# Altium PCB PCB-NW0101 Rev.D.PcbDoc (part 3 of 3)
Units mm, origin at the board's own origin, x right, y up, seen from the top; angles counter-clockwise.
Board outline 20 x 35 mm, 6 copper layers (Top, GND, Inner3, Inner4, PWR, Bottom), stack 0.74 mm thick; 118 components, 125 nets, 559 pads, 474 vias.
Unrouted connection lines stored in the file: 214.
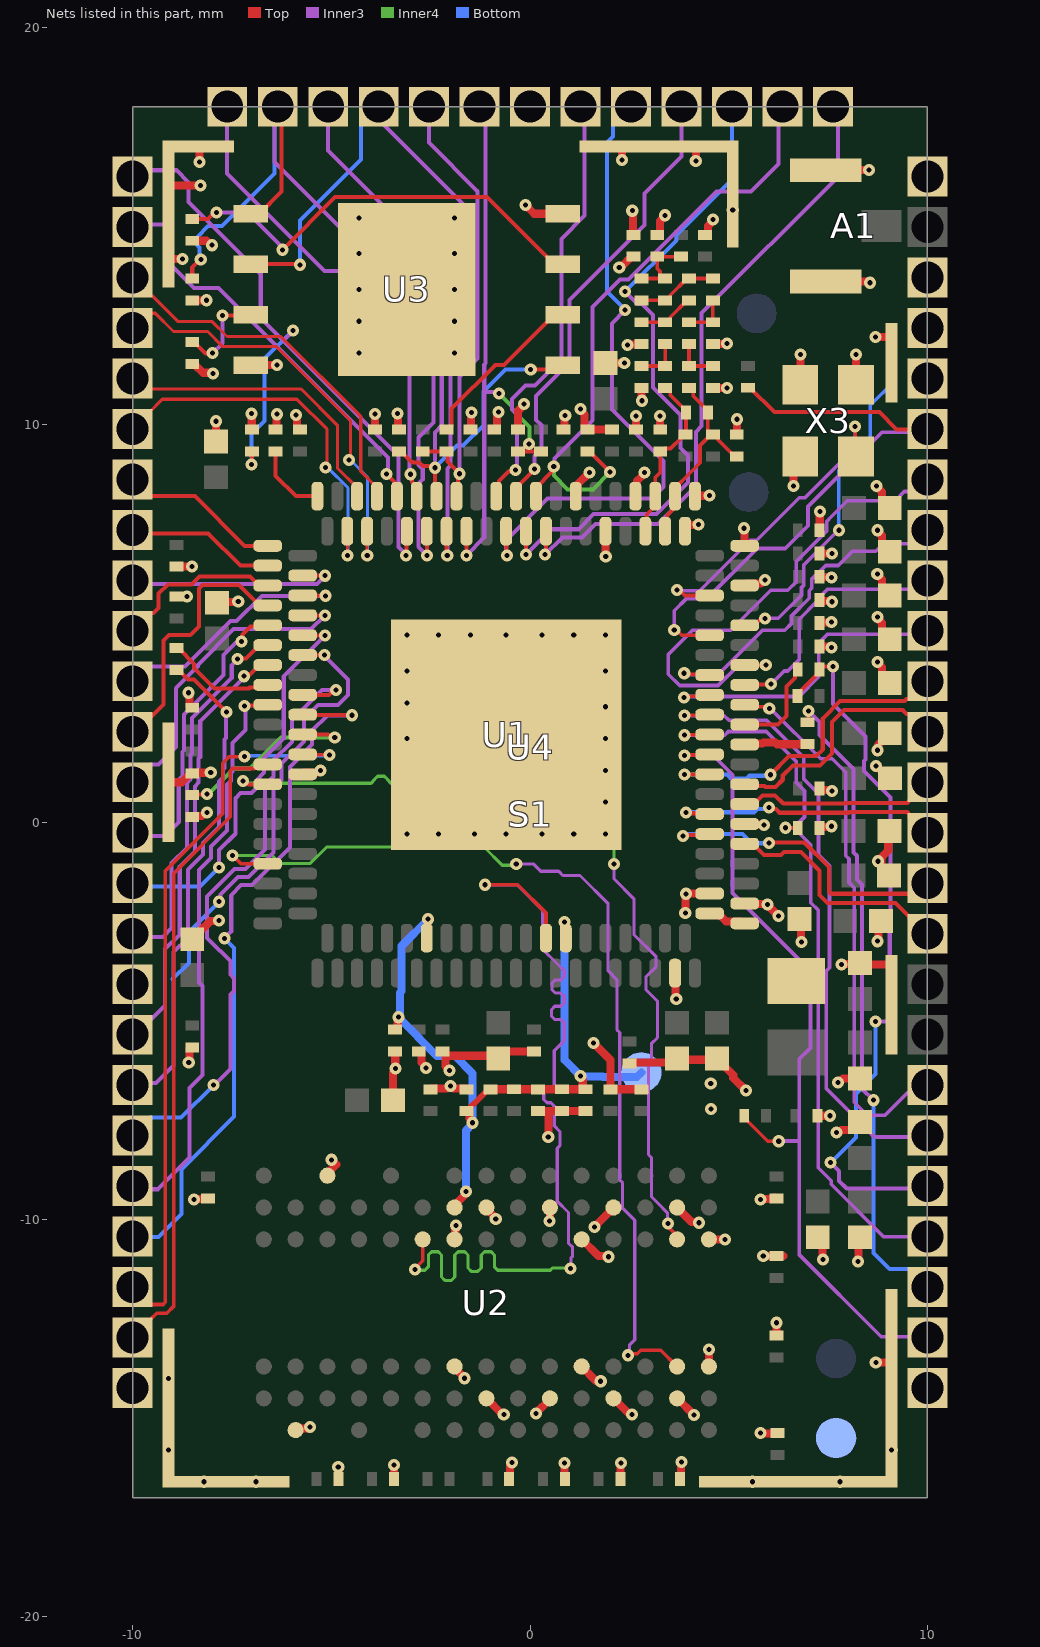
[diagram p7: the nets of this part, all layers, seen from the top]

## Via types
v1: diameter 0.305/0.305/0.305/0.305 (per signal layer), hole 0.127, Top to Bottom, tented both sides, 474 vias

## Nets (pads, with @x,y where several pads share a name; then routed paths per layer and width w, separated by ;. In a path a pad name is that pad's centre, name@x,y a point inside that pad or via, vN(x,y) a via of type N, cw(c..) or ccw(c..) an arc to the next point about the centre after c; other vN are vias at no path point) (continued)
DDR_UDM: U1.64 U2.B3 | length 22.6
  Top w0.092: v1(-7.221,1.036) -7.176,1.036 -7.086,0.945 -6.605,0.945 U1.64@-6.6,0.95 ; v1(3.468,-10.098) 3.508,-10.139 3.508,-10.223 3.7,-10.415 U2.B3@3.7,-10.5
  Inner3 w0.079: v1@2.112,-1.057 2.112,-1.429 2.611,-1.928 2.611,-2.829 3.172,-3.391 3.172,-3.639 2.918,-3.893 2.918,-4.223 3.205,-4.51 3.205,-5.426 3.052,-5.579 3.052,-5.984 2.979,-6.057 2.979,-8.369 3.052,-8.441 3.052,-9.423 3.218,-9.589 3.457,-9.828 3.457,-10.087 v1(3.468,-10.098)
  Inner4 w0.078: v1(-7.221,1.036) -7.178,0.992 -7.091,0.992 -7.075,0.976 -4.039,0.976 -3.999,0.976 -3.916,1.059 -3.916,1.069 -3.833,1.152 -3.667,1.152 -3.584,1.069 -3.584,1.059 -3.501,0.976 -3.335,0.976 -3.252,1.059 -3.252,1.069 -3.168,1.152 -3.002,1.152 -2.919,1.069 -2.919,1.059 -2.836,0.976 -2.67,0.976 -2.587,1.059 -2.587,1.069 -2.504,1.152 -2.337,1.152 -2.254,1.069 -2.254,1.059 -2.171,0.976 -2.005,0.976 -1.922,1.059 -1.922,1.069 -1.839,1.152 -1.673,1.152 -1.59,1.069 -1.59,1.059 -1.506,0.976 -1.092,0.976 0.289,0.976 1.092,0.173 1.877,0.173 2.193,-0.143 2.193,-0.546 2.112,-0.627 v1(2.112,-1.055)
DDR_UDQS: U1.72 U2.B7 | length 24.5
  Top w0.092: v1(-7.483,-0.841) -7.274,-1.05 U1.72@-6.6,-1.05 ; v1(2.463,-13.418) 2.503,-13.377 2.7,-13.377 2.785,-13.292 3.292,-13.292 U2.B7@3.7,-13.7
  Inner3 w0.079: v1(-0.348,-1.054) 0.081,-1.054 0.266,-1.239 0.718,-1.239 0.826,-1.347 1.256,-1.347 1.964,-2.055 1.964,-3.743 2.185,-3.965 2.185,-5.223 2.258,-5.295 2.258,-9.007 2.33,-9.079 2.33,-9.721 2.456,-9.848 2.633,-10.024 2.633,-13.027 2.506,-13.154 2.506,-13.375 v1(2.463,-13.418)
  Inner4 w0.078: v1(-7.483,-0.841) -7.481,-0.843 -6.49,-0.843 -6.292,-1.041 -5.531,-1.041 -5.118,-0.628 -1.16,-0.628 -0.699,-1.089 -0.382,-1.089 v1(-0.348,-1.054)
DDR_VREF: C4.1 C5.1 C11.2 C12.1 C13.1 pad.6 R1.1 R2.2 U1.90 U1.104 U2.J2 | length 19.4
  Top w0.152: C4.1@-1.55,-7.275 -1.501,-7.226 -1.501,-7.178 -1.247,-6.924 -1.247,-6.922 -1.031,-6.706 C11.2@-0.965,-6.706
  Top w0.203: C12.1@-3.335,-5.21 -3.33,-5.205 -3.33,-4.931 v1(-3.31,-4.911) ; U1.90@-2.6,-2.92 -2.581,-2.901 -2.581,-2.465 v1(-2.563,-2.446) ; U2.J2@-1.9,-9.7 -1.9,-9.645 -1.634,-9.379 -1.634,-9.314 v1(-1.615,-9.294) ; C4.1@-1.55,-7.275 -1.527,-7.298 -1.527,-7.459 -1.447,-7.539 v1(-1.447,-7.567) ; C11.2@-1,-6.725 R1.1@-0.4,-6.725 R2.2@0.2,-6.725 C13.1@0.8,-6.725 1.327,-6.725 1.327,-6.474 1.27,-6.418 v1(1.27,-6.39) ; v1(0.871,-2.517) 0.886,-2.531 0.886,-2.906 U1.104@0.9,-2.92
  Bottom w0.203: v1(-2.563,-2.446) -3.235,-3.118 -3.235,-4.255 -3.275,-4.295 -3.275,-4.804 -3.291,-4.82 -3.291,-4.867 -3.278,-4.879 v1(-3.31,-4.911) -2.8,-5.422 -2.8,-5.434 -2.341,-5.893 -1.88,-5.893 -1.447,-6.326 v1(-1.447,-7.567) ; v1(-1.615,-9.294) -1.615,-7.762 v1@-1.445,-7.592 ; v1(0.871,-2.517) 0.871,-5.992 v1(1.27,-6.39) ; v1@1.317,-6.406 1.82,-6.406 1.829,-6.414 2.686,-6.414 pad.6@2.8,-6.3
DDR_WE: U1.102 U2.K3 | length 22.5
  Top w0.092: v1(-2.899,-11.257) -2.899,-11.239 -2.702,-11.042 -2.702,-10.526 U2.K3@-2.692,-10.516 ; v1(-1.132,-1.579) -0.312,-1.579 0.4,-2.291 U1.102@0.4,-2.92
  Inner3 w0.079: v1(-1.132,-1.579) -0.321,-1.579 0.31,-2.211 0.31,-3.194 0.715,-3.599 0.86,-3.744 0.86,-3.888 0.777,-3.971 0.636,-3.971 0.553,-4.054 0.553,-4.22 0.636,-4.304 0.777,-4.304 0.86,-4.387 0.86,-4.553 0.777,-4.636 0.622,-4.636 0.539,-4.72 0.539,-4.886 0.622,-4.969 0.777,-4.969 0.86,-5.052 0.86,-5.126 0.86,-5.501 0.61,-5.751 0.61,-6.277 0.61,-6.649 0.527,-6.733 0.428,-6.733 0.345,-6.816 0.345,-6.982 0.428,-7.065 0.527,-7.065 0.61,-7.149 0.61,-7.618 0.61,-7.645 0.752,-7.786 0.752,-8.143 0.684,-8.211 0.684,-9.539 0.968,-9.824 0.968,-10.599 1.07,-10.701 1.07,-10.925 1.031,-10.965 1.031,-11.227 v1(1.023,-11.235)
  Inner4 w0.078: v1(-2.899,-11.257) -2.878,-11.278 -2.681,-11.278 -2.642,-11.278 -2.559,-11.195 -2.559,-10.897 -2.476,-10.814 -2.309,-10.814 -2.226,-10.897 -2.226,-11.449 -2.143,-11.532 -1.977,-11.532 -1.894,-11.449 -1.894,-10.897 -1.811,-10.814 -1.645,-10.814 -1.561,-10.897 -1.561,-11.223 -1.478,-11.306 -1.312,-11.306 -1.229,-11.223 -1.229,-10.897 -1.146,-10.814 -0.98,-10.814 -0.897,-10.897 -0.897,-11.195 -0.814,-11.278 -0.45,-11.278 0.508,-11.278 0.562,-11.224 1.011,-11.224 v1(1.023,-11.235)
EPHY_VRT: R23.1 U1.39 | length 1.9
  Top w0.102: R23.1@-6.4,9.325 -6.4,8.711 -5.889,8.2 U1.39@-5.35,8.2
ETH_RN: U1.34 U4.B4 | length 10.5
  Top w0.079: U4.B4@-9.677,12.802 -9.431,12.802 -8.971,12.341 -8.113,12.341 -7.732,11.96 -6.38,11.96 -4.519,10.099 -4.519,9.145 v1(-4.555,9.108) ; U1.34@-4.1,7.32 -4.098,7.318 -4.098,6.703 v1(-4.097,6.702)
  Bottom w0.079: v1(-4.555,9.108) -4.519,9.108 -4.093,8.682 -4.093,6.706 v1(-4.097,6.702)
ETH_RP: U1.33 U4.B3 | length 8.8
  Top w0.079: U4.B3@-9.631,13.331 -9.54,13.24 -9.506,13.24 -8.864,12.598 -8.006,12.598 -7.626,12.217 -6.274,12.217 -4.262,10.205 -4.262,9.009 -4.262,8.822 -3.85,8.41 U1.33@-3.85,8.2
ETH_TN: U1.36 U4.B6 | length 9
  Top w0.079: U4.B6@-9.601,10.289 -9.251,10.639 -5.866,10.639 -5.106,9.879 -5.106,8.955 v1(-5.142,8.918) ; U1.36@-4.6,7.32 -4.595,7.315 -4.595,6.707 v1(-4.589,6.702)
  Bottom w0.079: v1(-5.142,8.918) -5.091,8.918 -4.582,8.408 -4.582,6.709 v1(-4.589,6.702)
ETH_TP: U1.35 U4.B5 | length 7.2
  Top w0.079: U4.B5@-9.665,10.79 -9.559,10.896 -9.428,10.896 -5.759,10.896 -4.849,9.986 -4.849,8.909 -4.35,8.41 U1.35@-4.35,8.2
GND: A1.2 A1.3 C1.2 C2.2 C3.2 C4.2 C5.2 C6.2 C7.2 C8.2 C9.2 C10.2 C12.2 C13.2 C14.2 C15.2 C16.2 C17.2 C18.2 C19.2 C20.2 C21.2 C22.2 C23.2 C24.2 C25.2 C26.2 C27.2 C28.2 C29.2 C30.2 C31.2 C32.2 C33.2 C34.2 C35.2 C36.2 C37.2 C38.2 C39.2 C40.2 C41.2 C42.2 C43.2 C44.2 C45.2 C46.2 C47.2 C48.2 C49.2 C50.2 C51.1 C52.2 C54.2 C55.2 C58.2 C61.2 C62.2 C63.1 C64.2 C65.2 C66.2 C67.2 C68.2 C69.2 C70.2 C71.2 C72.2 C73.2 C74.2 C75.2 C76.2 C77.2 C78.2 C79.2 C80.2 L5.2 pad.2 R2.1 R8.1 R15.1 R17.1 R18.1 R19.1 R23.2 R24.2 S1.1 S1.2 S1.3 S1.4 S1.5 S1.6 S1.7 S1.8 S1.9 S1.10 S1.11 U1.1 U1.2 U1.7 U1.10 U1.13 U1.63 U1.115 U1.120 U1.121 U1.128 U1.152 U1.156 U1.157 U2.A3 U2.A7 U2.B2 U2.B8 U2.D2 U2.D8 U2.E3 U2.E7 U2.F2 U2.F8 U2.H2 U2.H8 U2.J3 U2.J7 U2.N1 U2.P9 U3.4 U3.9 U4.B25 U4.C1 U4.C3 U4.C4 U4.C25 X3.1 X3.2 X3.4 | length 76.2
  Top w0.203: S1.2@-9.1,1 -8.762,1 -8.518,1.245 v1(-8.034,1.245) ; C14.2@-8.9,5.675 v1(-8.631,5.674) ; C16.2@-8.9,6.425 v1(-8.509,6.426) ; v1(-8.742,14.168) -9.052,14.168 -9.1,14.216 -9.1,15.964 -9.052,16.013 v1(-8.29,16.013) ; v1(-8.591,3.252) -8.571,3.233 -8.571,2.898 -8.548,2.875 C23.2@-8.5,2.875 ; v1(-8.587,-6.047) -8.568,-6.028 -8.568,-5.698 -8.523,-5.698 C64.2@-8.5,-5.675 ; C1.2@-8.5,-2.95 -8.042,-2.492 -7.839,-2.492 v1(-7.823,-2.476) ; R24.2@-8.5,0.125 -8.477,0.148 -8.25,0.148 -8.155,0.242 v1(-8.128,0.242) ; C34.2@-8.5,1.225 -8.49,1.235 -8.064,1.235 v1@-8.054,1.225 ; v1(-8.46,-9.494) -8.451,-9.484 -8.109,-9.484 C9.2@-8.1,-9.475 ; S1.9@-8.35,17 -8.314,16.964 v1(-8.314,16.605) ; C17.2@-7.899,9.576 v1@-7.899,10.058 ; C35.2@-7.874,5.517 -7.857,5.534 -7.359,5.534 v1(-7.342,5.55) ; U3.4@-7.024,11.495 v1(-6.364,11.495) ; v1(-7.006,10.274) -7.003,10.271 -7.003,9.878 R17.1@-7,9.875 ; R23.2@-6.4,9.875 -6.382,9.893 -6.382,10.243 v1(-6.364,10.261) ; U2.P9@-5.9,-15.3 -5.861,-15.261 -5.608,-15.261 -5.567,-15.22 v1(-5.54,-15.22) ; v1(-5.891,10.241) -5.891,10.213 -5.865,10.187 -5.865,9.898 -5.851,9.885 C80.2@-5.782,9.885 ; U1.63@-5.72,1.2 -5.674,1.246 -5.35,1.246 -5.304,1.293 v1(-5.276,1.293) ; U2.N1@-5.1,-8.9 -5.1,-8.845 -4.875,-8.62 ; C70.2@-4.825,-16.486 v1(-4.825,-16.228) ; v1(-3.897,10.271) -3.899,10.269 -3.899,9.881 C15.2@-3.893,9.875 ; C74.2@-3.45,-7 -3.45,-6.299 -3.383,-6.232 v1(-3.383,-6.205) ; C67.2@-3.425,-16.596 v1(-3.425,-16.183) ; C12.2@-3.392,-5.776 -3.392,-6.189 v1@-3.377,-6.205 ; v1(-3.339,10.276) -3.32,10.256 -3.32,9.895 R18.1@-3.3,9.875 ; C22.2@-2.8,-5.775 -2.75,-5.775 -2.727,-5.798 -2.727,-6.05 -2.616,-6.161 v1(-2.616,-6.188) ; C73.2@-2.5,-6.725 -2.477,-6.702 -2.085,-6.702 -2.03,-6.646 v1(-2.002,-6.646) ; C20.2@-2.2,-5.775 -2.15,-5.775 C20.2@-2.127,-5.798 ; v1(-2.029,-6.248) -2.029,-6.242 -2.127,-6.145 C20.2@-2.127,-5.798 ; v1@-1.975,-6.648 -1.921,-6.702 -1.623,-6.702 C4.2@-1.6,-6.725 ; U2.J7@-1.9,-13.7 -1.9,-13.733 -1.651,-13.982 v1(-1.651,-13.995) ; U2.J3@-1.9,-10.5 -1.882,-10.482 -1.882,-10.175 v1(-1.864,-10.157) ; C19.2@-1.5,9.875 -1.487,9.888 -1.487,10.288 v1(-1.473,10.302) ; U2.H8@-1.1,-14.5 -0.7,-14.9 -0.67,-14.9 v1(-0.66,-14.91) ; U2.H2@-1.1,-9.7 -1.1,-9.729 -0.864,-9.965 v1(-0.864,-9.993) ; C24.2@-0.9,9.875 -0.877,9.898 -0.827,9.898 -0.827,10.258 -0.791,10.294 v1(-0.791,10.321) ; C2.2@-0.8,-5.95 -0.868,-5.882 -2.043,-5.882 C20.2@-2.127,-5.798 ; C2.2@-0.8,-5.882 -0.693,-5.775 C77.2@0.1,-5.775 ; C69.2@-0.516,-16.591 -0.502,-16.577 -0.502,-16.187 -0.453,-16.139 v1(-0.453,-16.111) ; R19.1@-0.3,9.875 -0.3,9.898 -0.3,10.339 -0.152,10.487 v1(-0.152,10.514) ; v1(0.152,-14.884) 0.152,-14.871 0.5,-14.523 U2.F8@0.5,-14.5 ; R2.1@0.25,-7.275 0.803,-7.275 1.437,-7.275 1.412,-7.3 C5.2@1.4,-7.3 ; v1(0.458,-7.928) 0.464,-7.922 0.464,-7.275 ; v1(0.494,-10.043) 0.497,-10.04 0.497,-9.703 U2.F2@0.5,-9.7 ; C43.2@0.846,9.876 0.866,9.896 0.866,10.208 v1(0.885,10.228) ; v1(0.864,-16.129) 0.869,-16.135 0.869,-16.58 C68.2@0.882,-16.593 ; U1.13@1.15,8.2 1.196,8.246 1.196,8.498 v1(1.495,8.797) ; v1(1.272,10.389) 1.291,10.37 1.291,10.342 1.374,10.259 1.374,9.9 1.398,9.876 C46.2@2.057,9.876 ; U2.E7@1.3,-13.7 1.662,-14.062 1.768,-14.062 v1(1.778,-14.072) ; U2.E3@1.3,-10.5 1.719,-10.919 1.951,-10.919 v1(1.971,-10.939) ; v1(1.595,-5.558) 1.601,-5.558 2.027,-5.984 C65.2@2.027,-6.725 C72.2@2.8,-6.725 ; v1(1.622,-10.193) 1.622,-10.186 2.1,-9.708 U2.D2@2.1,-9.7 ; U1.10@1.9,7.32 1.903,7.318 1.903,6.683 v1(1.905,6.68) ; C42.2@1.9,11.55 1.901,11.551 v1(2.371,11.552) ; U2.D8@2.1,-14.5 2.5,-14.9 2.556,-14.9 v1(2.565,-14.91) ; v1(2.244,13.953) 2.264,13.972 2.297,13.972 2.55,14.225 C75.2@2.6,14.225 ; C8.2@2.281,-16.595 2.281,-16.134 v1(2.286,-16.129) ; v1(2.312,16.656) 2.312,16.952 2.361,17 S1.10@3.25,17 4.122,17 4.171,16.952 v1(4.171,16.635) ; v1(2.453,12) 2.453,12.02 2.795,12.02 L5.2@2.8,12.025 ; C78.2@2.5,-6.075 2.523,-6.052 3.598,-6.052 C3.2@3.7,-5.95 ; U1.7@2.65,8.2 2.696,8.246 2.696,8.587 2.876,8.767 v1(2.876,8.79) ; v1(2.661,10.214) 2.664,10.211 2.664,9.879 C47.2@2.667,9.876 ; C55.2@2.8,10.925 2.809,10.916 2.809,10.609 v1(2.819,10.6) ; C61.2@3.2,14.775 3.25,14.775 3.273,14.798 3.273,15.119 3.392,15.238 v1(3.392,15.266) ; v1(3.271,10.215) 3.274,10.212 3.274,9.879 C51.1@3.277,9.876 ; U1.115@3.65,-3.8 3.665,-3.815 3.665,-4.437 v1(3.679,-4.451) ; U2.B8@3.7,-14.5 3.703,-14.5 4.122,-14.919 v1(4.125,-14.919) ; U2.B2@3.734,-9.728 3.734,-9.734 4.064,-10.064 4.232,-10.064 v1(4.251,-10.084) ; C7.2@3.78,-16.595 3.798,-16.577 3.798,-16.129 3.81,-16.117 v1(3.81,-16.104) ; C3.2@3.783,-5.867 3.898,-5.982 4.732,-5.982 5.114,-6.364 5.114,-6.438 5.431,-6.755 v1(5.431,-6.757) ; U1.2@3.9,7.32 3.9,7.425 3.948,7.474 4.231,7.474 v1(4.241,7.483) ; v1(3.906,-2.293) 3.914,-2.285 3.914,-1.814 v1(3.923,-1.806) ; v1@3.943,-1.826 3.966,-1.803 4.517,-1.803 U1.121@4.52,-1.8 ; U1.1@4.15,8.2 4.159,8.209 4.503,8.209 v1(4.512,8.218) ; C62.2@4.4,14.775 4.45,14.775 4.473,14.798 4.473,14.999 4.603,15.129 v1(4.603,15.157) ; U2.A7@4.5,-13.7 v1(4.5,-13.268) ; U2.A3@4.5,-10.5 4.502,-10.502 4.904,-10.502 v1(4.907,-10.505) ; C54.2@4.6,10.925 4.602,10.924 4.952,10.924 v1(4.953,10.922) ; C58.2@4.6,12.025 4.607,12.032 4.946,12.032 v1(4.953,12.04) ; C52.2@5.127,9.773 5.203,9.773 5.203,10.131 v1(5.207,10.135) ; v1(5.385,7.391) 5.392,7.384 5.392,6.958 U1.156@5.4,6.95 ; U1.120@5.4,-2.05 5.414,-2.064 5.961,-2.064 v1(5.975,-2.079) ; U1.128@5.4,-0.05 5.414,-0.064 5.872,-0.064 v1(5.886,-0.078) ; U1.152@5.4,5.95 5.446,5.996 5.81,5.996 5.906,6.092 v1(5.908,6.092) ; v1(5.8,-15.375) 5.81,-15.385 6.21,-15.385 C10.2@6.225,-15.4 ; v1(5.8,-9.5) 5.81,-9.49 6.127,-9.49 6.146,-9.471 C6.2@6.146,-9.452 ; v1(5.867,-10.922) 5.869,-10.923 6.225,-10.923 6.376,-10.923 6.377,-10.925 ; v1@5.976,-2.096 5.987,-2.096 6.253,-2.362 v1(6.253,-2.368) ; C71.2@6.2,-12.925 v1(6.2,-12.6) ; v1(6.633,8.458) 6.633,8.867 X3.2@6.833,9.067 ; C26.2@6.66,-2.423 6.815,-2.578 6.815,-3.003 v1(6.834,-3.022) ; X3.1@6.807,11.107 v1(6.807,11.76) ; C50.2@7.235,-7.391 v1(7.549,-7.391) ; C79.2@7.239,-10.45 7.363,-10.574 7.363,-11.001 v1(7.373,-11.011) ; C39.2@7.275,6.725 7.306,6.756 v1(7.596,6.756) ; R8.1@7.285,-0.152 7.285,-0.149 7.309,-0.126 7.569,-0.126 v1(7.588,-0.106) ; C63.1@7.285,0.824 7.309,0.801 7.581,0.801 v1(7.6,0.782) ; C18.2@7.285,5.004 7.297,5.016 7.577,5.016 v1(7.589,5.028) ; C45.2@7.285,7.341 7.289,7.344 7.289,7.813 v1(7.292,7.816) ; C41.2@7.291,5.56 7.293,5.562 7.577,5.562 v1(7.596,5.542) ; C37.2@7.296,6.175 7.307,6.164 7.581,6.164 v1(7.589,6.156) ; C21.2@7.397,4.42 7.529,4.42 7.555,4.394 v1(7.583,4.394) ; A1.3@7.4,13.6 7.402,13.598 8.506,13.598 8.535,13.569 v1(8.549,13.569) ; A1.2@7.4,16.4 7.401,16.401 v1(8.533,16.402) v1(8.533,16.402) ; v1(7.713,-7.811) 7.732,-7.791 7.796,-7.791 7.839,-7.748 8.102,-7.748 8.2,-7.65 C49.2@8.2,-7.55 ; v1(7.753,-6.55) 7.781,-6.55 7.875,-6.456 8.2,-6.456 C30.2@8.204,-6.451 ; v1(7.834,-3.581) 7.843,-3.572 8.102,-3.572 C31.2@8.2,-3.473 ; C48.2@8.2,-10.45 8.268,-10.518 8.268,-11.036 v1(8.249,-11.055) ; X3.4@8.204,11.104 v1(8.204,11.76) ; C31.2@8.3,-3.55 8.341,-3.59 9.052,-3.59 9.1,-3.639 S1.7@9.1,-4.6 ; v1(8.693,12.204) 9.052,12.204 9.1,12.156 S1.8@9.1,11.55 ; v1(8.7,-13.597) 9.052,-13.597 9.1,-13.646 S1.6@9.1,-14.25 ; v1(8.707,1.413) 8.711,1.413 9.024,1.1 C32.2@9.05,1.1 ; v1(8.722,8.456) 8.722,8.429 8.852,8.3 8.852,8.098 C44.2@9.05,7.9 ; v1(8.738,6.24) 8.738,6.213 8.852,6.099 8.852,5.898 C36.2@9.05,5.7 ; v1(8.745,5.159) 8.765,5.14 8.765,5.095 8.852,5.008 8.852,4.798 C40.2@9.05,4.6 ; v1(8.746,-2.999) 8.765,-2.98 C25.2@8.765,-2.456 ; v1(8.746,1.806) 8.765,1.825 8.765,1.95 C29.2@9.05,2.235 C29.2@9.053,2.235 ; v1(8.746,4.027) 8.746,3.999 8.852,3.894 8.852,3.698 C33.2@9.05,3.5 ; v1(8.746,7.341) 8.746,7.314 8.852,7.208 8.852,6.998 9.043,6.807 C38.2@9.046,6.807 ; v1(8.751,-0.988) 8.751,-0.98 9.012,-0.719 9.012,-0.427 9.091,-0.348 C28.2@9.091,-0.281 ; v1@8.837,-0.964 8.837,-1.148 C27.2@9.045,-1.356
  other v1: -8.2,-16.6 -6.9,-16.6 5.6,-16.6 7.8,-16.6 -9.1,-15.8 9.1,-15.8 -9.1,-14 -4.997,-8.499 4.552,-7.22 4.547,-6.584 -3.1,-0.3 -2.3,-0.3 -1.4,-0.3 -0.6,-0.3 0.3,-0.3 1.1,-0.3 1.9,-0.3 1.9,0.5 1.9,1.3 -3.1,2.1 1.9,2.1 1.9,2.9 -3.1,3 -3.1,3.8 1.9,3.8 -3.1,4.7 -2.3,4.7 -1.5,4.7 -0.6,4.7 0.3,4.7 1.1,4.7 1.9,4.7 -7.899,10.084 -4.3,11.8 -1.9,11.8 -4.3,12.6 -1.9,12.6 -4.3,13.4 -1.9,13.4 -4.3,14.3 -1.9,14.3 -4.3,15.2 -1.9,15.2 5.1,15.4
I2C_SCL: U1.20 U4.A5 | length 15.6
  Top w0.102: U1.20@-0.6,7.32 -0.592,7.312 -0.592,6.713 v1(-0.584,6.706)
  Inner3 w0.102: v1(-0.584,6.706) -0.61,6.731 -0.61,7.087 0.44,8.136 3.063,8.136 3.363,8.436 3.363,9.081 2.06,10.384 2.06,12.549 2.389,12.878 v1(2.389,12.887)
  Bottom w0.102: U4.A5@2.091,17.551 2.091,17.253 1.94,17.101 1.94,13.345 2.389,12.895 v1(2.389,12.887)
I2C_SDA: U1.21 U4.A6 | length 10.6
  Top w0.102: U1.21@-0.85,8.2 -0.784,8.266 -0.784,8.577 -0.546,8.815 -0.401,8.815 v1(-0.362,8.854)
  Inner3 w0.102: v1(-0.362,8.854) -0.327,8.889 -0.327,10.257 -0.457,10.388 -0.457,10.64 -0.114,10.984 0.13,10.984 0.787,11.641 0.787,14.675 1.372,15.259 U4.A6@1.372,17.549
I2S_CLK: U1.19 U4.A4 | length 11.2
  Top w0.102: U1.19@-0.35,8.2 -0.35,8.435 -0.333,8.435 0.108,8.876 v1(0.108,8.884)
  Inner3 w0.102: v1(0.108,8.884) v1(0.108,8.884) 0.11,9.216 0.283,9.389 0.283,9.987 0.152,10.117 0.152,10.719 0.991,11.557 0.991,13.13 2.878,15.017 2.878,15.815 3.81,16.748 U4.A4@3.81,17.564
I2S_SDI: U1.16 U4.A1 | length 15.7
  Top w0.102: v1(0.381,6.731) 0.4,6.75 U1.16@0.4,7.32
  Inner3 w0.102: v1(0.381,6.731) 0.813,7.163 1.303,7.163 1.644,7.503 3.219,7.503 4.175,8.46 4.175,9.818 4.318,9.96 4.318,12.804 7.747,16.233 U4.A1@7.747,17.551
I2S_SDO: R15.2 U1.17 U4.A2 | length 15.3
  Top w0.102: U1.17@0.15,8.2 0.15,8.41 0.557,8.817 0.557,8.903 v1(0.596,8.941) ; R15.2@1.498,9.326 1.764,9.06 1.764,9.055 2.014,8.805 v1(2.014,8.802)
  Inner3 w0.102: v1(0.596,8.941) 0.617,8.962 0.617,9.149 1.577,10.109 1.577,12.963 2.263,13.649 2.478,13.649 4.691,15.862 5.558,15.862 6.256,16.56 U4.A2@6.256,17.599
  Inner4 w0.102: v1(0.596,8.941) v1(0.596,8.941) 0.597,8.715 0.942,8.371 1.582,8.371 v1(2.014,8.802)
I2S_WS: U1.18 U4.A3 | length 16.3
  Top w0.102: v1(-0.102,6.731) -0.1,6.733 U1.18@-0.1,7.32
  Inner3 w0.102: v1(-0.102,6.731) 0.533,7.366 1.219,7.366 1.602,7.749 3.177,7.749 3.972,8.544 3.972,9.228 3.786,9.414 3.786,10.246 3.099,10.933 3.099,12.754 2.823,13.029 2.704,13.029 v1(2.389,13.344)
  Bottom w0.102: v1(2.389,13.344) 3.683,14.638 3.683,14.772 5.08,16.169 U4.A3@5.08,17.554
IO11: U1.29 U4.A13 | length 12.1
  Top w0.102: v1(-3.005,8.75) -2.966,8.711 -2.966,8.555 -2.85,8.439 U1.29@-2.85,8.2
  Inner3 w0.102: U4.A13@-7.62,17.542 -7.62,16.315 -5.17,13.865 -3.797,13.865 -3.035,13.102 -3.035,8.78 v1(-3.005,8.75)
IO14: U1.40 U4.B7 | length 3.5
  Top w0.102: U4.B7@-9.551,8.2 -8.429,8.2 -7.179,6.95 U1.40@-6.6,6.95
IO15: U1.42 U4.B8 | length 3.3
  Top w0.102: U4.B8@-9.554,7.252 -9.554,7.256 -9.551,7.259 -8.097,7.259 -7.288,6.45 U1.42@-6.6,6.45
IO16: U1.43 U4.B9 | length 5
  Top w0.102: U1.43@-5.72,6.2 -5.159,6.2 v1(-5.156,6.198)
  Inner3 w0.102: U4.B9@-9.544,5.994 -5.359,5.994 v1(-5.156,6.198)
IO17: U1.44 U4.B10 | length 3.8
  Top w0.102: U4.B10@-9.703,5.107 -9.551,5.259 -9.473,5.259 -9.449,5.283 -9.447,5.283 -9.344,5.386 -9.344,5.746 -9.112,5.978 -8.515,5.978 -8.321,6.173 -7.042,6.173 -6.819,5.95 U1.44@-6.6,5.95
IO38: R8.2 U1.137 U4.C22 | length 18
  Top w0.092: v1(3.886,2.184) 3.894,2.192 4.512,2.192 U1.137@4.52,2.2 ; v1(6.427,-0.144) 6.727,-0.144 R8.2@6.735,-0.152
  Inner3 w0.092: v1(3.886,2.184) 4.897,2.184 4.991,2.279 5.944,2.279 6.694,1.529 6.694,1.002 6.906,0.789 6.906,0.124 6.638,-0.144 ; v1(6.427,-0.144) 6.638,-0.144 ; 9.496,-10.433 8.895,-10.433 7.577,-9.115 7.577,-9.027 7.249,-8.7 7.249,-2.217 7.064,-2.032 7.064,-0.57 6.638,-0.144
IO44: U1.144 U4.C7 | length 12.1
  Top w0.092: U1.144@5.4,3.95 5.402,3.948 v1(5.932,3.946) v1(5.932,3.946)
  Inner3 w0.092: v1(5.932,3.946) 5.244,3.946 4.731,3.434 3.764,3.434 3.48,3.718 3.48,4.216 4.089,4.826 5.052,4.826 6.058,5.832 6.487,5.832 6.696,6.042 6.696,6.556 7.469,7.328 7.469,7.569 7.592,7.692 7.592,7.694 7.985,8.086 9.186,8.086 9.416,8.316 U4.C7@9.616,8.316
JTAG_TCK: U1.140 U4.C19 | length 13.3
  Top w0.092: U1.140@5.4,2.95 5.451,2.899 5.979,2.899 v1(6.02,2.859)
  Inner3 w0.092: v1(6.02,2.859) 6.045,2.859 7.314,1.59 7.604,1.59 7.944,1.25 7.944,-0.847 8.024,-0.927 8.024,-1.522 8.158,-1.657 8.158,-7.053 8.482,-7.378 8.93,-7.378 9.495,-6.812
JTAG_TDI: U1.142 U4.C9 | length 6
  Top w0.092: U1.142@5.4,3.45 5.41,3.46 6.055,3.46 v1(6.065,3.469)
  Inner3 w0.092: v1(6.065,3.469) 6.395,3.799 6.482,3.799 6.771,4.088 6.771,5.102 7.216,5.548 7.216,5.588 7.484,5.856 9.641,5.856 U4.C9@9.728,5.944
JTAG_TDO: U1.143 U4.C8 | length 8.1
  Top w0.092: v1(3.879,3.743) 3.901,3.722 4.498,3.722 U1.143@4.52,3.7
  Inner3 w0.092: v1(3.879,3.743) 3.914,3.708 4.732,3.708 5.848,4.824 6.408,4.824 6.577,4.994 6.577,5.183 7.022,5.628 7.022,5.819 7.084,5.881 7.084,6.101 7.439,6.456 7.754,6.456 8.114,6.816 8.7,6.816 8.889,7.005 9.555,7.005 U4.C8@9.586,7.036
JTAG_TMS: U1.141 U4.C10 | length 7.5
  Top w0.092: v1(3.873,3.133) 3.906,3.167 4.487,3.167 U1.141@4.52,3.2
  Inner3 w0.092: v1(3.873,3.133) 3.898,3.159 6.766,3.159 7.264,3.658 7.264,4.503 7.485,4.724 U4.C10@9.576,4.724
JTAG_TRST: U1.139 U4.C20 | length 15.3
  Top w0.092: v1(3.887,2.676) 3.898,2.688 4.508,2.688 U1.139@4.52,2.7
  Inner3 w0.092: v1(3.887,2.676) 4.888,2.676 5.006,2.559 5.95,2.559 6.888,1.621 6.888,1.082 7.258,0.712 7.258,-0.828 7.533,-1.104 7.533,-3.668 7.453,-3.748 7.453,-6.708 8.67,-7.925 U4.C20@9.542,-7.925
LXBK: L1.1 U1.118 U1.119 | length 0.9
  Top w0.203: U1.119@4.52,-2.3 4.732,-2.3 4.936,-2.504 5.298,-2.504 U1.118@5.359,-2.565
PCIE_CKN: U1.132 U4.C12 | length 5.7
  Top w0.104: U1.132@5.415,0.95 5.458,0.907 5.902,0.907 5.926,0.883 6.179,0.883 6.359,1.063 6.359,1.169 6.615,1.425 7.294,1.425 7.597,1.728 7.597,2.513 7.899,2.816 9.377,2.816 9.474,2.718 9.552,2.718 9.651,2.619 U4.C12@9.651,2.539
PCIE_CKP: U1.133 U4.C11 | length 7.6
  Top w0.104: v1(3.886,1.194) 3.889,1.197 4.517,1.197 U1.133@4.52,1.2 ; v1(6.053,1.189) 6.52,1.656 7.198,1.656 7.366,1.824 7.366,2.609 7.804,3.046 9.429,3.046 9.474,3.092 U4.C11@9.552,3.092
  Bottom w0.104: v1(3.886,1.194) 4.953,1.194 5.051,1.095 5.45,1.095 5.519,1.164 6.027,1.164 v1(6.053,1.189)
PCIE_RXN: U1.130 U4.C13 | length 4.5
  Top w0.104: U1.130@5.4,0.45 5.633,0.45 5.851,0.668 6.167,0.668 6.371,0.463 7.925,0.463 7.942,0.48 9.491,0.48 9.552,0.541 9.552,0.552 9.612,0.612 U4.C13@9.692,0.612
PCIE_RXP: U1.129 U4.C14 | length 6.5
  Top w0.104: v1(3.924,0.241) 3.945,0.221 4.499,0.221 U1.129@4.52,0.2 ; v1(6.011,0.362) 6.05,0.324 6.185,0.324 6.276,0.233 8.021,0.233 8.038,0.25 9.491,0.25 9.552,0.189 U4.C14@9.552,0.098
  Bottom w0.104: v1(3.924,0.241) 3.928,0.245 5.638,0.245 5.717,0.323 5.973,0.323 v1(6.011,0.362)
PCIE_TXN: U1.126 U4.C16 | length 5.4
  Top w0.104: U1.126@5.4,-0.55 5.607,-0.55 5.887,-0.83 6.313,-0.83 6.389,-0.754 6.815,-0.754 7.288,-1.227 7.288,-1.84 7.484,-2.036 9.196,-2.036 9.552,-2.392 U4.C16@9.552,-2.442
PCIE_TXP: U1.127 U4.C15 | length 7.5
  Top w0.104: v1(3.851,-0.351) 3.876,-0.326 4.494,-0.326 U1.127@4.52,-0.3 ; v1(6.014,-0.524) 6.025,-0.512 6.9,-0.512 7.518,-1.131 7.518,-1.744 7.579,-1.805 U4.C15@9.652,-1.805
  Bottom w0.104: v1(3.851,-0.351) 3.889,-0.313 3.957,-0.313 3.965,-0.305 5.343,-0.305 5.573,-0.535 6.003,-0.535 v1(6.014,-0.524)
PERST_N: R16.1 U1.135 U4.C24 | length 20.4
  Top w0.092: v1(3.886,1.676) 3.898,1.688 4.508,1.688 U1.135@4.52,1.7 ; R16.1@5.389,-7.391 5.389,-7.441 5.98,-8.032 v1(6.257,-8.032)
  Inner3 w0.092: v1(3.886,1.676) 4.609,1.676 5.094,1.191 5.094,-1.786 7.055,-3.746 7.055,-5.688 6.77,-5.973 6.77,-10.885 8.839,-12.954 U4.C24@9.549,-12.954 ; v1(6.257,-8.032) 6.263,-8.026 6.756,-8.026
PORST_N: R11.2 R13.1 U4.C21 | length 17.7
  Top w0.102: R13.1@6.733,3.225 R11.2@7.262,3.754 ; R11.2@7.309,3.909 7.312,3.912 v1(7.62,3.912)
  Top w0.203: R13.1@6.733,3.175 R13.1@6.733,3.225 ; R11.2@7.285,3.835 7.285,3.885 R11.2@7.309,3.909
  Inner3 w0.102: v1(7.558,-8.57) 7.775,-8.787 7.775,-9.032 7.969,-9.226 U4.C21@9.556,-9.226 ; v1(7.62,3.912) 7.62,2.972 8.441,2.151 8.441,1.578 8.402,1.539 8.402,1.287 9.069,0.62 9.069,-2.386 9.051,-2.404 9.051,-4.682 9.169,-4.801 9.169,-4.885 9.039,-5.015 v1(8.696,-5.015)
  Bottom w0.102: v1(7.558,-8.57) 7.571,-8.57 8.2,-7.941 8.2,-6.84 8.696,-6.345 v1(8.696,-5.015)
PORST_N_1: R11.1 U1.138 | length 2.4
  Top w0.102: U1.138@5.4,2.45 6.235,2.45 6.455,2.671 6.455,3.413 6.661,3.619 6.661,3.761 R11.1@6.735,3.835
PWM0: U1.45 U4.B11 | length 5.7
  Top w0.102: U1.45@-5.72,5.7 -5.716,5.696 -5.148,5.696 v1(-5.144,5.692)
  Inner3 w0.102: U4.B11@-9.551,3.909 -8.687,3.909 -7.542,5.055 -7.385,5.055 -6.747,5.692 v1(-5.144,5.692)
PWM1: U1.46 U4.B12 | length 6
  Top w0.102: U4.B12@-9.544,2.646 -9.227,2.963 -9.227,4.387 -9.227,4.563 -9.09,4.701 -8.55,4.701 -8.326,4.924 -8.326,5.88 -8.237,5.969 -7.329,5.969 -6.81,5.45 U1.46@-6.6,5.45
REF_CLKO: R10.1 U4.C23 | length 15.7
  Top w0.102: R10.1@6.985,2.51 7.008,2.533 v1(7.008,2.795)
  Inner3 w0.102: v1(7.008,2.795) 7.281,2.522 7.281,2.195 8.143,1.332 8.143,-0.765 8.227,-0.849 8.227,-1.445 8.357,-1.574 8.357,-6.712 v1(8.645,-7)
  Bottom w0.102: v1(8.645,-7) 8.645,-10.845 9.051,-11.251 U4.C23@9.574,-11.251
REF_CLKO_1: R10.2 U1.136 | length 1.6
  Top w0.203: U1.136@5.406,1.956 5.424,1.974 5.849,1.974 5.877,2.001 6.171,2.001 6.217,1.956 R10.2@6.985,1.956
RF_DIFF+: C56.1 C59.2 L5.1 | length 1.5
  Top w0.092: L5.1@2.794,12.548 2.821,12.575 C56.1@3.353,12.575 ; C56.1@3.353,12.624 3.499,12.624 3.529,12.654 3.529,12.704 3.95,13.125 C59.2@4,13.125
RF_DIFF-: C57.1 C58.1 L4.1 | length 1.2
  Top w0.092: C57.1@4,12.575 C58.1@4.6,12.575 C58.1@4.623,12.598 ; C58.1@4.597,12.598 4.6,12.601 L4.1@4.6,13.125
RF_HP+: C55.1 C56.2 L2.2 | length 1.2
  Top w0.092: C55.1@2.794,11.43 2.839,11.475 L2.2@3.4,11.475 3.4,12.011 C56.2@3.404,12.014
RF_HP-: C54.1 C57.2 L3.2 | length 1.2
  Top w0.092: C57.2@4.013,12.04 4,12.026 C57.2@4,12.025 L3.2@4,11.475 C54.1@4.6,11.475 4.603,11.475 C54.1@4.623,11.455
RF_LP: C60.1 C61.1 L6.2 L7.1 | length 1.9
  Top w0.092: C60.1@2.794,13.64 2.829,13.675 L6.2@3.4,13.675 3.35,13.675 3.271,13.754 3.271,13.854 3.2,13.925 C61.1@3.2,14.225 3.25,14.225 L7.1@3.8,14.225
RF_LP+: C51.2 C53.1 L2.1 R9.1 U1.5 U1.6 | length 4.2
  Top w0.092: U1.6@2.9,7.32 2.936,7.356 2.936,7.744 U1.5@3.15,7.958 ; U1.5@3.15,8.2 3.15,8.667 3.272,8.789 3.272,9.292 C51.2@3.303,9.322 ; C51.2@3.3,9.325 3.374,9.399 3.537,9.399 3.783,9.645 3.783,9.67 3.813,9.7 3.925,9.7 C53.1@3.925,10.3 ; L2.1@3.404,10.922 3.453,10.922 3.529,10.846 3.529,10.746 3.925,10.35 C53.1@3.925,10.3
RF_LP-: C52.1 C53.2 L3.1 R12.1 U1.3 U1.4 | length 5.3
  Top w0.092: U1.4@3.4,7.32 3.456,7.376 3.456,7.723 3.582,7.85 3.582,8.342 4.092,8.852 4.277,9.037 4.277,9.476 4.529,9.728 4.671,9.728 4.729,9.67 4.729,9.62 5.15,9.199 C52.1@5.2,9.199 ; L3.1@4,10.925 4.027,10.925 4.106,10.846 4.106,10.719 4.475,10.35 C53.2@4.475,10.305 ; C53.2@4.47,10.312 4.47,10.255 C53.2@4.505,10.22 ; R12.1@4.535,9.768 4.475,9.828 4.475,10.19 C53.2@4.547,10.262
RF_NOTCH: C59.1 C60.2 L4.2 L6.1 | length 2.1
  Top w0.092: C60.2@2.794,13.106 2.813,13.125 L6.1@3.4,13.125 ; L6.1@3.404,13.106 3.431,13.106 3.529,13.204 3.529,13.254 3.95,13.675 C59.1@4,13.675 L4.2@4.6,13.675 4.638,13.675 L4.2@4.648,13.665
RXD0: U1.31 U4.B2 | length 10
  Top w0.102: v1(-3.614,8.759) -3.416,8.561 -3.416,8.266 U1.31@-3.35,8.2
  Inner3 w0.102: U4.B2@-9.54,15.037 -9.106,15.037 -9.047,14.977 -9.047,14.025 -8.456,13.433 -7.837,13.433 -3.575,9.172 -3.575,8.798 v1(-3.614,8.759)
RXD1: U1.148 U4.C5 | length 8.1
  Top w0.092: U1.148@5.4,4.95 5.642,4.95 5.776,5.084 5.87,5.084 v1(5.91,5.125)
  Inner3 w0.092: v1(5.91,5.125) 6.245,5.125 6.828,5.708 6.828,5.899 6.89,5.961 6.89,6.475 7.756,7.341 v1(7.77,7.341)
  Bottom w0.092: v1(7.77,7.341) 7.77,8.85 8.561,9.641 8.561,10.484 U4.C5@9.149,11.071
RXD2: U1.48 U4.B14 | length 7
  Top w0.102: v1(-7.263,4.546) -7.235,4.574 -7.235,4.718 -7.032,4.921 -6.629,4.921 U1.48@-6.6,4.95
  Inner3 w0.102: U4.B14@-9.544,-0.356 -9.195,-0.356 -8.839,0 -8.839,1.067 -8.745,1.16 -8.745,1.767 -8.705,1.808 -8.705,2.707 -7.709,3.702 -7.709,4.207 -7.41,4.507 -7.302,4.507 v1(-7.263,4.546)
SD_CD: U1.50 U4.B16 | length 9
  Top w0.102: v1(-7.364,4.1) -7.346,4.117 -7.143,4.117 -6.81,4.45 U1.50@-6.6,4.45
  Inner3 w0.102: U4.B16@-9.547,-2.89 -9.24,-2.89 -9.017,-2.667 -9.017,-1.033 -8.636,-0.652 -8.636,0.982 -8.542,1.076 -8.542,1.683 -8.501,1.724 -8.501,2.623 -7.506,3.618 -7.506,3.938 -7.364,4.081 v1(-7.364,4.1)
SD_CLK: R22.1 U4.B19 | length 11.9
  Top w0.102: R22.1@-8.85,3.825 -8.609,3.584 -8.453,3.584 -7.641,2.772 v1(-7.641,2.765)
  Inner3 w0.102: U4.B19@-9.547,-6.562 -9.407,-6.562 -8.966,-6.121 -8.966,-3.269 -8.611,-2.913 -8.611,-1.201 -8.23,-0.82 -8.23,-0.533 -7.823,-0.127 -7.823,1.025 -7.729,1.118 -7.729,1.319 -7.689,1.36 -7.689,2.071 -7.647,2.113 -7.647,2.759 v1(-7.641,2.765)
SD_CLK_1: R22.2 U1.54 | length 2.8
  Top w0.102: R22.2@-8.839,4.364 -8.452,3.977 -8.452,3.876 -8.319,3.742 -8.319,3.737 -7.945,3.364 -7.075,3.364 -7.055,3.384 -6.666,3.384 U1.54@-6.6,3.45
SD_CMD: U1.55 U4.B20 | length 15
  Top w0.102: U1.55@-5.72,3.2 -5.063,3.2 -4.942,3.321 v1(-4.887,3.321)
  Inner3 w0.102: v1(-7.966,-6.617) -7.937,-6.617 -7.532,-6.212 -7.532,-4.342 -7.447,-4.257 -7.447,-3.933 -7.54,-3.841 -7.54,-3.497 -7.807,-3.23 -7.814,-3.23 -8.128,-2.916 -8.128,-1.875 -7.437,-1.184 -7.163,-1.184 -6.667,-0.688 -6.667,0.931 -6.452,1.146 -6.452,1.557 -5.994,2.014 -5.994,2.562 -5.235,3.321 v1(-4.887,3.321)
  Bottom w0.102: U4.B20@-9.551,-7.441 -8.781,-7.441 -7.966,-6.626 v1(-7.966,-6.617)
SD_D0: U1.52 U4.B18 | length 10.3
  Top w0.102: v1(-7.201,3.669) -7.162,3.708 -7.052,3.708 -6.81,3.95 U1.52@-6.6,3.95
  Inner3 w0.102: U4.B18@-9.548,-4.978 -9.182,-4.612 -9.182,-3.198 -8.814,-2.829 -8.814,-1.117 -8.433,-0.736 -8.433,0.898 -8.339,0.992 -8.339,1.599 -8.298,1.64 -8.298,2.539 -7.201,3.636 v1(-7.201,3.669)
SD_D1: U1.51 U4.B17 | length 11.2
  Top w0.102: U1.51@-5.72,4.2 -5.719,4.199 v1(-5.173,4.198) v1(-5.173,4.198)
  Inner3 w0.102: v1(-7.823,-2.005) -7.784,-1.966 -7.784,-1.819 -7.353,-1.387 -7.079,-1.387 -6.459,-0.767 -6.459,0.852 -6.248,1.062 -6.248,1.472 -5.69,2.031 -5.69,2.58 -5.33,2.94 -4.837,2.94 -4.582,3.195 -4.582,3.588 -5.173,4.179 v1(-5.173,4.198)
  Bottom w0.102: -8.991,-3.952 -8.584,-3.544 -8.584,-2.769 -7.823,-2.008 v1(-7.823,-2.005)
SD_D2: U1.57 U4.B22 | length 17.3
  Top w0.102: U1.57@-5.72,2.7 -5.713,2.693 -4.49,2.693 v1(-4.483,2.686)
  Inner3 w0.102: v1(-7.687,-2.925) -7.518,-2.756 -7.518,-1.862 -7.517,-1.86 -7.517,-1.838 -7.268,-1.59 -6.995,-1.59 -6.045,-0.641 -6.045,1.388 -5.486,1.947 -5.486,2.297 -5.097,2.686 v1(-4.483,2.686)
  Bottom w0.102: U4.B22@-9.54,-10.439 -9.348,-10.439 -8.775,-9.867 -8.775,-8.743 -7.447,-7.415 -7.447,-3.166 v1(-7.687,-2.925)
SD_D3: U1.56 U4.B21 | length 13.9
  Top w0.102: v1(-7.188,2.924) -7.175,2.937 -6.613,2.937 U1.56@-6.6,2.95
  Inner3 w0.102: U4.B21@-9.53,-9.24 -9.367,-9.24 -8.571,-8.444 -8.571,-6.697 -8.242,-6.368 -8.242,-4.126 -8.331,-4.036 -8.331,-1.209 -8.026,-0.904 -8.026,-0.618 -7.62,-0.211 -7.62,0.94 -7.526,1.034 -7.526,1.235 -7.485,1.276 -7.485,1.987 -7.157,2.316 -7.157,2.893 v1(-7.188,2.924)
SD_WP: U1.49 U4.B15 | length 9.6
  Top w0.102: U1.49@-5.72,4.7 -5.716,4.696 -5.164,4.696 v1(-5.161,4.693)
  Inner3 w0.102: v1(-7.827,-1.142) -7.823,-1.139 -7.823,-0.702 -7.417,-0.295 -7.417,0.598 -7.284,0.73 -7.01,0.73 -6.899,0.841 -6.899,1.032 -6.689,1.241 -6.689,1.607 -6.198,2.098 -6.198,3.658 v1(-5.161,4.693) v1(-5.161,4.693)
  Bottom w0.102: U4.B15@-9.537,-1.626 -8.31,-1.626 v1(-7.827,-1.142)
SPI_CLK: R4.1 R21.2 U1.25 U4.A9 | length 11.4
  Top w0.102: R21.2@-2.718,9.322 -2.715,9.325 R4.1@-2.1,9.325 ; R4.1@-2.081,9.287 -2.081,9.066 v1(-1.778,8.763) -1.814,8.727 -1.814,8.236 U1.25@-1.85,8.2 U1.25@-1.871,8.222
  Inner3 w0.102: U4.A9@-2.54,17.555 -2.54,17.092 -1.319,15.871 -1.319,11.659 -1.778,11.199 v1(-1.778,8.763)
SPI_CLK_1: R4.2 U3.6 | length 4.3
  Top w0.102: R4.2@-2.05,9.875 -1.976,9.949 -1.976,10.399 -0.875,11.499 -0.657,11.499 0.569,12.725 U3.6@0.813,12.725
SPI_CS0: R5.1 U1.28 U3.1 U4.A12 | length 22.1
  Top w0.102: R5.1@-8.45,13.675 -8.45,13.699 -8.5,13.749 -8.5,13.952 -8.302,14.151 v1(-8.285,14.151) ; U3.1@-7.405,15.14 -7.28,15.265 U3.1@-7.112,15.265 ; U3.1@-6.808,15.305 -6.248,15.865 U4.A12@-6.248,17.571 ; U1.28@-2.6,7.32 -2.595,7.315 -2.595,6.71 v1(-2.591,6.706)
  Top w0.203: U3.1@-7.024,15.305 U3.1@-6.808,15.305
  Inner3 w0.102: U4.A12@-6.426,17.554 -6.426,16.608 -4.679,14.861 -3.899,14.861 -2.425,13.387 -2.425,10.058 -2.801,9.681 -2.801,8.988 -2.7,8.886 -2.7,8.802 -2.7,8.624 -2.811,8.513 -2.811,6.926 v1(-2.591,6.706)
  Bottom w0.102: v1(-8.285,14.151) -8.322,14.188 -8.322,14.456 -8.373,14.506 -8.373,14.718 -8.097,14.993 -7.751,14.993 -6.426,16.318 U4.A12@-6.426,17.586
SPI_CS1: R19.2 R20.2 U1.24 U4.A8 | length 14.7
  Top w0.102: v1(-1.6,6.706) U1.24@-1.6,7.32 ; R19.2@-0.3,9.325 R19.2@-0.25,9.325 ; v1(-0.022,9.515) -0.06,9.515 -0.249,9.326 R20.2@0.279,9.326
  Inner3 w0.102: v1(-1.6,6.706) -1.153,7.153 -1.153,10.817 ; U4.A8@-1.177,17.738 -1.115,17.676 -1.115,11.543 -1.153,11.506 -1.153,10.817 ; v1(-0.783,10.782) -0.818,10.817 -1.153,10.817
  Inner4 w0.102: v1(-0.783,10.782) -0.457,10.456 -0.457,10.388 -0.009,9.94 -0.009,9.528 v1(-0.022,9.515)
SPI_MISO: U1.26 U3.2 U4.A10 | length 18
  Top w0.102: U3.2@-7.024,14.035 -5.805,14.035 v1(-5.791,14.021) ; U1.26@-2.1,7.32 -2.1,6.723 v1(-2.083,6.706)
  Inner3 w0.102: U4.A10@-3.658,17.526 -1.522,15.391 -1.522,11.747 -2.007,11.262 -2.007,8.965 -2.083,8.889 v1(-2.083,6.706)
  Bottom w0.102: v1(-5.791,14.021) -5.791,15.136 -4.259,16.668 U4.A10@-4.259,17.549
SPI_MOSI: R18.2 U1.27 U3.5 U4.A11 | length 16.5
  Top w0.102: R18.2@-3.3,9.325 -3.25,9.325 -2.98,9.055 -2.945,9.055 -2.938,9.048 -2.788,9.048 -2.693,8.953 -2.435,8.953 v1(-2.396,8.914) -2.396,8.246 U1.27@-2.35,8.2 ; v1(0.017,11.381) 0.711,11.381 U3.5@0.824,11.495
  Inner3 w0.102: U4.A11@-5.08,17.523 -5.08,16.891 -2.222,14.033 -2.222,9.973 -2.396,9.799 v1(-2.396,8.914)
  Bottom w0.102: v1(-2.396,8.914) -1.843,9.468 -1.683,9.468 -1.168,9.983 -1.168,10.828 -0.615,11.381 v1(0.017,11.381)
SPIFLASH_NRESET: R7.1 U3.7 | length 11
  Top w0.102: R7.1@-8.477,15.157 -8.458,15.175 -8.108,15.175 -7.948,15.335 v1(-7.893,15.335) ; v1(-6.23,14.398) -4.904,15.724 -1.31,15.724 -1.308,15.723 -1.079,15.723 0.608,14.035 U3.7@0.824,14.035
  Inner3 w0.102: v1(-7.893,15.335) -7.107,15.335 -6.314,14.542 -6.314,14.537 -6.23,14.453 v1(-6.23,14.398)
SPIFLASH_NWP: R6.1 U3.3 | length 2.6
  Top w0.102: R6.1@-8.491,12.116 -8.17,11.795 -7.999,11.795 v1(-7.994,11.8) ; v1(-7.74,12.747) -7.218,12.747 -7.137,12.827 -7.086,12.827 U3.3@-7.024,12.765 ; U3.3@-7.229,12.776 U3.3@-7.137,12.776
  Inner3 w0.102: v1(-7.994,11.8) -7.986,11.8 -7.74,12.046 v1(-7.74,12.747)
TXD0: R17.2 U1.30 U4.B1 | length 17.9
  Top w0.102: v1(-7.01,8.992) -7,9.002 R17.2@-7,9.325 ; v1(-3.124,6.706) -3.112,6.718 -3.112,7.308 U1.30@-3.1,7.32
  Inner3 w0.102: U4.B1@-9.544,16.4 -8.9,16.4 -8.595,16.095 -8.595,15.605 -6.776,13.787 -6.776,12.68 -6.205,12.109 -3.309,9.214 -3.309,6.923 -3.124,6.738 v1(-3.124,6.706) ; -6.198,12.116 -5.969,12.344 v1(-5.969,12.37)
  Bottom w0.102: v1(-7.01,8.992) -7.01,9.765 -6.68,10.095 -6.68,11.659 v1(-5.969,12.37)
TXD1: R14.1 U1.147 U4.C6 | length 14
  Top w0.092: v1(3.629,4.832) 3.686,4.832 3.818,4.7 U1.147@4.52,4.7
  Top w0.102: R14.1@5.486,10.926 5.536,10.926 6.15,10.312 8.793,10.312 9.225,9.881 U4.C6@9.525,9.881
  Inner3 w0.092: v1(3.629,4.832) 3.627,4.834 3.627,5.085 3.625,5.086 3.625,5.314 3.934,5.623 4.454,5.623 5.714,6.883 6.423,6.883 6.992,7.452 6.992,7.941 8.855,9.804 U4.C6@9.545,9.804
TXD2: U1.47 U4.B13 | length 7.4
  Top w0.102: U1.47@-5.72,5.2 v1@-5.161,5.2
  Inner3 w0.102: U4.B13@-9.551,1.449 -9.351,1.449 -8.908,1.892 -8.908,3.366 -8.354,3.92 -8.354,3.955 -7.457,4.851 -5.51,4.851 v1(-5.161,5.201)
USB_D+: U1.61 U4.B23 | length 18
  Top w0.091: U4.B23@-9.546,-12.14 -9.233,-12.14 -9.18,-12.086 -9.18,-1.233 -7.735,0.212 -7.735,1.481 -7.569,1.646 v1(-7.181,1.646)
  Top w0.092: U1.61@-5.72,1.7 -5.714,1.694 -5.053,1.694 v1(-5.047,1.688)
  Bottom w0.092: v1(-7.181,1.646) -7.16,1.667 -5.068,1.667 v1(-5.047,1.688)
USB_D-: U1.62 U4.B24 | length 15.8
  Top w0.091: U4.B24@-9.546,-12.516 -9.537,-12.507 -9.537,-12.5 -9.396,-12.358 -9.143,-12.358 -8.961,-12.176 -8.961,-1.288 -7.541,0.132 -7.541,1.292 -7.488,1.345 -6.947,1.345 -6.843,1.449 U1.62@-6.601,1.449
USB_VRT: R24.1 U1.59 | length 5
  Top w0.102: R24.1@-8.478,0.68 -8.471,0.688 -8.141,0.688 v1(-8.128,0.7) ; U1.59@-5.72,2.2 -5.083,2.2 -5.047,2.165 -4.953,2.165 v1(-4.914,2.126)
  Inner4 w0.102: v1(-8.128,0.7) -8.092,0.7 -7.452,1.34 -7.049,1.34 -6.263,2.126 v1(-4.914,2.126)
VDD_FLASH: C75.1 R5.2 R6.2 R7.2 U3.8 U4.A7 | length 2.9
  Top w0.203: R5.2@-8.5,13.125 -8.498,13.127 -8.143,13.127 v1(-8.142,13.128) ; R6.2@-8.47,11.527 -8.444,11.502 -8.427,11.502 -8.229,11.304 -7.999,11.304 v1(-7.979,11.285) ; R7.2@-8.45,14.625 -8.143,14.625 -8.031,14.513 v1(-8.004,14.513) ; v1(-0.117,15.527) 0.105,15.305 U3.8@0.608,15.305 ; v1(2.573,15.381) 2.586,15.368 2.586,14.789 C75.1@2.6,14.775
XTALIN: U1.151 X3.3 | length 8.3
  Top w0.092: v1(3.696,5.84) 3.754,5.84 3.893,5.7 U1.151@4.52,5.7 ; X3.3@8.179,9.093 v1(8.179,9.95)
  Inner3 w0.092: v1(3.696,5.84) 3.719,5.817 4.267,5.817 5.542,7.091 5.706,7.091 6.773,8.158 6.921,8.158 8.179,9.416 v1(8.179,9.95)
pads on no net: U1.9 U1.11 U1.12 U1.37 U2.A2 U2.A8 U2.E2 U2.E8 U2.R3 U2.R7

## Polygon pours and split planes (outlines as drawn)
GND on Top "GND_L01_P006" (solid, pour order 6): -10,18.2 10,18.2 10,-17 -10,-17
1V2 on Top "Top-1V2" (solid, remove dead copper, pour order 4): 4.95,-4.873 4.95,-6.652 7.299,-6.652 7.299,-5.997 9.097,-5.997 9.097,-3.994 7.525,-3.994 7.525,-4.873
LXBK on Top "Top-LXBK" (solid, remove dead copper, pour order 5): 4.928,-2.337 4.928,-2.978 5.461,-2.978 5.461,-4.738 7.425,-4.738 7.425,-3.279 6.401,-3.279 6.401,-2.337
GND on Bottom "GND_L06_P003" (solid, pour order 3): -10,18.2 10,18.2 10,-17 -10,-17
1V2 on Bottom "1V2_L06_P002" (solid, pour order 2): -8.204,3.353 -4.699,3.353 -4.699,6.299 -1.3,6.299 -1.3,9.5 -0.4,9.5 -0.4,6.299 3.632,6.299 3.632,4.394 6.8,4.394 6.8,2.362 4.089,2.362 4.089,1.456 7.735,1.456 7.735,0.3 3.886,0.3 3.886,-1.524 6.147,-1.524 6.147,-3.4 9,-3.4 9,-6.9 4.8,-6.9 4.8,-2.972 2.4,-2.972 -1.6,-2.972 -1.6,-4.5 -3.1,-4.5 -3.1,-2.972 -5.639,-2.972 -5.639,2.1 -8.204,2.1
VDD_FLASH on PWR (split plane): 2.592,11.095 -9.744,11.095 -9.744,17.744 2.592,17.744
3V3 on PWR (split plane): 9.744,-16.744 7.829,-16.744 7.829,-8.1 7.82,-8.05 7.792,-8.008 7.75,-7.98 7.7,-7.971 5.929,-7.971 5.929,-4.039 5.92,-3.989 5.892,-3.947 5.85,-3.919 5.8,-3.909 5.209,-3.909 5.209,-1.206 7.95,-1.206 8,-1.196 8.042,-1.168 8.07,-1.126 8.08,-1.077 8.08,-0.432 8.07,-0.382 8.042,-0.34 8,-0.312 7.95,-0.302 5.209,-0.302 5.209,1.448 5.2,1.497 5.172,1.539 5.13,1.567 5.08,1.577 -9.744,1.577 -9.744,10.836 2.721,10.836 2.771,10.846 2.813,10.874 2.841,10.916 2.851,10.965 2.851,17.744 9.744,17.744
1V8 on PWR (split plane): 4.951,-0.432 4.96,-0.481 4.988,-0.523 5.03,-0.551 5.08,-0.561 7.821,-0.561 7.821,-0.947 5.08,-0.947 5.03,-0.957 4.988,-0.985 4.96,-1.027 4.951,-1.077 4.951,-4.039 4.96,-4.088 4.988,-4.13 5.03,-4.158 5.08,-4.168 5.671,-4.168 5.671,-8.1 5.68,-8.15 5.708,-8.192 5.75,-8.22 5.8,-8.229 7.571,-8.229 7.571,-16.744 -9.744,-16.744 -9.744,1.318 4.951,1.318
GND on GND (split plane): 9.744,-16.744 -9.744,-16.744 -9.744,17.744 9.744,17.744

## Other copper
Bottom:
  rectangle net GND: -3.6,-0.8 2.4,5.2
PWR (plane layer: these items are gaps in the copper):
  lines w0.254: -10.009,17.905 -9.926,17.988 ; 6.456,-17 -10,-17 ; -10,-17 -10,1.448 5.08,1.448 5.08,-0.432 7.95,-0.432 7.95,-1.077 5.08,-1.077 5.08,-4.039 5.8,-4.039 5.8,-8.1 7.7,-8.1 7.7,-17 -10,-17 ; -10,10.965 -10,18 2.721,18 2.721,10.965 -10,10.965

## Silkscreen, mask and mechanical layers (free items; w line width, h text height)
Silkscreen Top:
  text "NW0101 Rev.D" at 7.513,-15.972 h0.51 r90
Solder Mask Bottom:
  region: 2.413,5.207 2.413,-0.864 2.362,-0.813 -3.607,-0.813 -3.607,5.207
Shield Drawing:
  lines w0.254: 5.1,17 5.1,12.55 9.1,12.55 9.1,-16.6 -9.1,-16.6 -9.1,17 5.107,17
Outline:
  lines w0: -10,-17 -10,18 10,18 10,-17 -10,-17
  lines w1.2: -10,-17 -10,18 10,18 10,-17 -10,-17
Drill Drawing:
  lines w0.025: -5.1,0 -5.099,0 ; 0,-7.5 0.001,-7.5 ; 0.6,3.1 0.601,3.1 ; 0,7.5 0.001,7.5 0,7.5 ; 5.1,0 5.101,0

## Dimensions
7.62,18 to 5.743,17.001 on Drill Drawing
10,-17 to 9,-9.786 on Drill Drawing
-10,-17 to -9,-9.801 on Drill Drawing
6.5,-5.8 to 10,-17 on Drill Drawing
2.8,-6.3 to 10,-17 on Drill Drawing
7.7,-13.5 to 10,-17 on Drill Drawing
5.7,12.8 to 10,18 on Drill Drawing
5.5,8.3 to 10,18 on Drill Drawing
-10,18 to 5.5,8.3 on Drill Drawing
-10,18 to 5.7,12.8 on Drill Drawing
-10,-17 to 6.5,-5.8 on Drill Drawing
-10,-17 to 2.8,-6.3 on Drill Drawing
-10,-17 to 7.7,-13.5 on Drill Drawing
-10,-17 to 7.7,-15.5 on Drill Drawing
2.4,5.2 to 2.4,-0.8 on Drill Drawing
-3.6,-0.8 to 2.4,-0.8 on Drill Drawing
10.98,14.446 to 11.378,12.55 on Shield Drawing
9.371,10.551 to 9.273,-3.353 on Shield Drawing
-9.1,-14.75 to 9.1,-14.25 on Shield Drawing
9.1,11.55 to -9.1,15.3 on Shield Drawing
5.1,15.8 to 9.1,11.55 on Shield Drawing
1.253,17.226 to 5.1,15.8 on Shield Drawing
1.25,17.227 to -7.452,17.236 on Shield Drawing
-9.1,15.3 to -7.452,17.231 on Shield Drawing
-6.055,-16.06 to 4.242,-16.203 on Shield Drawing
4.254,-16.201 to 9.1,-14.25 on Shield Drawing
-9.1,-14.75 to -6.054,-16.057 on Shield Drawing
9.26,-3.352 to 9.313,-5.848 on Shield Drawing
-9.401,-0.498 to -9.258,-12.75 on Shield Drawing
-9.258,-12.751 to -7.65,-16.6 on Shield Drawing
3.25,17 to 6.286,14.447 on Shield Drawing
9.371,10.552 to -10,18.2 on Shield Drawing
9.285,-11.754 to 9.313,-5.849 on Shield Drawing
6.75,-16.6 to 9.284,-11.754 on Shield Drawing
-9.406,-0.502 to -9.356,2.502 on Shield Drawing
-9.386,13.452 to -9.352,2.5 on Shield Drawing
-8.35,17 to -9.331,13.453 on Shield Drawing
3.25,17 to 6.75,-16.6 on Shield Drawing
-8.35,17 to -7.65,-16.6 on Shield Drawing
-0.6,2.2 to -10,-17 on Drill Drawing
10,18 to 7.62,18 on Drill Drawing
-1.27,18 to 0,18 on Drill Drawing
-10,18 to -7.62,18 on Drill Drawing
-10,-7.89 to -10,-6.62 on Drill Drawing
-10,18 to -10,16.24 on Drill Drawing
-10,-17 to -10,-14.24 on Drill Drawing
-0.6,2.2 to -10,-17 on Drill Drawing
-10,18 to 10,18 on Drill Drawing
10,18 to 10,-17 on Drill Drawing